# EAGLE board ECE AUTOMATION DESIGN (EAGLE 9.7.0)

Size 156.29 x 151.03 mm. Coordinates in mm from the lower left corner, seen from the top.
Outline: 0,0 156.29,0 156.29,151.03 0,151.03 0,0
Copper layers (1*16): Top 0.035mm / dielectric 1.5mm / Bottom 0.035mm
Design rules "default": minimum track width 6mil, minimum drill 0.35mm, track to track 6mil, track to pad 6mil, pad to pad 6mil, via to via 6mil, smd to smd 6mil, copper to edge 40mil, drill to drill 6mil, minimum pad ring 10mil, minimum via ring 8mil, stop-mask expansion 4mil, vias tented up to drill 0mil, thermal gap 10mil

## Footprints (pad centres in the part's own frame; a part is rotated, then mirrored left to right if it is on the bottom)
RESAD1016W63L850D250B = drill 0.83 pad 1.43: 1 -5.08,0; 2 5.08,0
GL5528 = drill 0.8 pad 1.4: 1 -1.702,0; 2 1.702,0
HA-06-SM065 = drill 1 pad 1.676: 1 -2.54,-2.54; 2 0,2.54; 3 2.54,-2.54
SG90 = drill 1.016 long: 1 -2.54,0; 2 0,0; 3 2.54,0
ARDUINO-UNO-R3-SHIELD = drill 1.016 pad 1.88: 3.3V 24.13,-2.54; 5V 24.13,0; A0 24.13,12.7; A1 24.13,15.24; A2 24.13,17.78; A3 24.13,20.32; A4 24.13,22.86; A5 24.13,25.4; AREF -24.13,-13.97; D2 -24.13,20.32; D3 -24.13,17.78; D4 -24.13,15.24; D5 -24.13,12.7; D6 -24.13,10.16; D7 -24.13,7.62; D8 -24.13,3.81; D9 -24.13,1.27; D10 -24.13,-1.27; D11 -24.13,-3.81; D12 -24.13,-6.35; D13 -24.13,-8.89; GND@0 24.13,2.54; GND@1 24.13,5.08; GND@2 -24.13,-11.43; IOREF 24.13,-7.62; NC 24.13,-10.16; RES 24.13,-5.08; RX -24.13,25.4; SCL -24.13,-19.05; SDA -24.13,-16.51; TX -24.13,22.86; VIN 24.13,7.62

## Placement (x,y rotation side)
R1  10k  [RESAD1016W63L850D250B]  108.6,53.31 270 top
R2  10k  [RESAD1016W63L850D250B]  128.92,53.31 270 top
R3  10k  [RESAD1016W63L850D250B]  113.68,53.31 270 top
R4  10k  [RESAD1016W63L850D250B]  123.84,53.31 270 top
R5  PHOTOCELL_GL5528  [GL5528]  136.92,93.14 0 top
R6  PHOTOCELL_GL5528  [GL5528]  109.86,93.04 0 top
R7  PHOTOCELL_GL5528  [GL5528]  104.52,143.36 0 top
R8  PHOTOCELL_GL5528  [GL5528]  143.37,144.05 0 top
RPOT1  10k  [HA-06-SM065]  141.62,50.77 0 top
RPOT2  10k  [HA-06-SM065]  149.24,50.77 0 top
SERVO1  SERVOSG90  [SG90]  6.99,70.34 270 top
SERVO2  SERVOSG90  [SG90]  11.08,30.07 270 top
U1  ARDUINO-UNO-R3-SHIELD  [ARDUINO-UNO-R3-SHIELD]  50.32,47.88 0 top

## Library data of the parts
R1-R8 RPOT1 RPOT2 SERVO1 SERVO2 U1 = Tinkercad

## Nets
R8_2: R5.2 R8.2
U1_5V: R6.2 R7.2 RPOT1.3 RPOT2.3 SERVO1.2 SERVO2.2 U1.5V
U1_A0: R1.1 R7.1 U1.A0
U1_A1: R3.1 R6.1 U1.A1
U1_A2: R4.1 R8.1 U1.A2
U1_A3: R2.1 R5.1 U1.A3
U1_D9: SERVO1.3 U1.D9
U1_D10: SERVO2.3 U1.D10
U1_GND: R1.2 R2.2 R3.2 R4.2 RPOT1.1 RPOT2.1 SERVO1.1 SERVO2.1 U1.GND@0 U1.GND@1 U1.GND@2

## Tracks (layer width: path | path; a pad name or v marks a point on that pad's centre or on a via)
R8_2  (1 unrouted)
U1_5V  (6 unrouted)
U1_A0  (2 unrouted)
U1_A1  (2 unrouted)
U1_A2  (2 unrouted)
U1_A3  (2 unrouted)
U1_D9  (1 unrouted)
U1_D10  (1 unrouted)
U1_GND  (10 unrouted)